# Altium PCB Planar design.PcbDoc
Units mil, origin at the board's own origin, x right, y up, seen from the top; angles counter-clockwise.
Board outline 4527.56 x 4330.71 mil, 4 copper layers (Top Layer, Mid 1, Mid 2, Bottom Layer), stack 68.583 mil thick; 7 components, 73 nets, 76 pads, 0 vias.
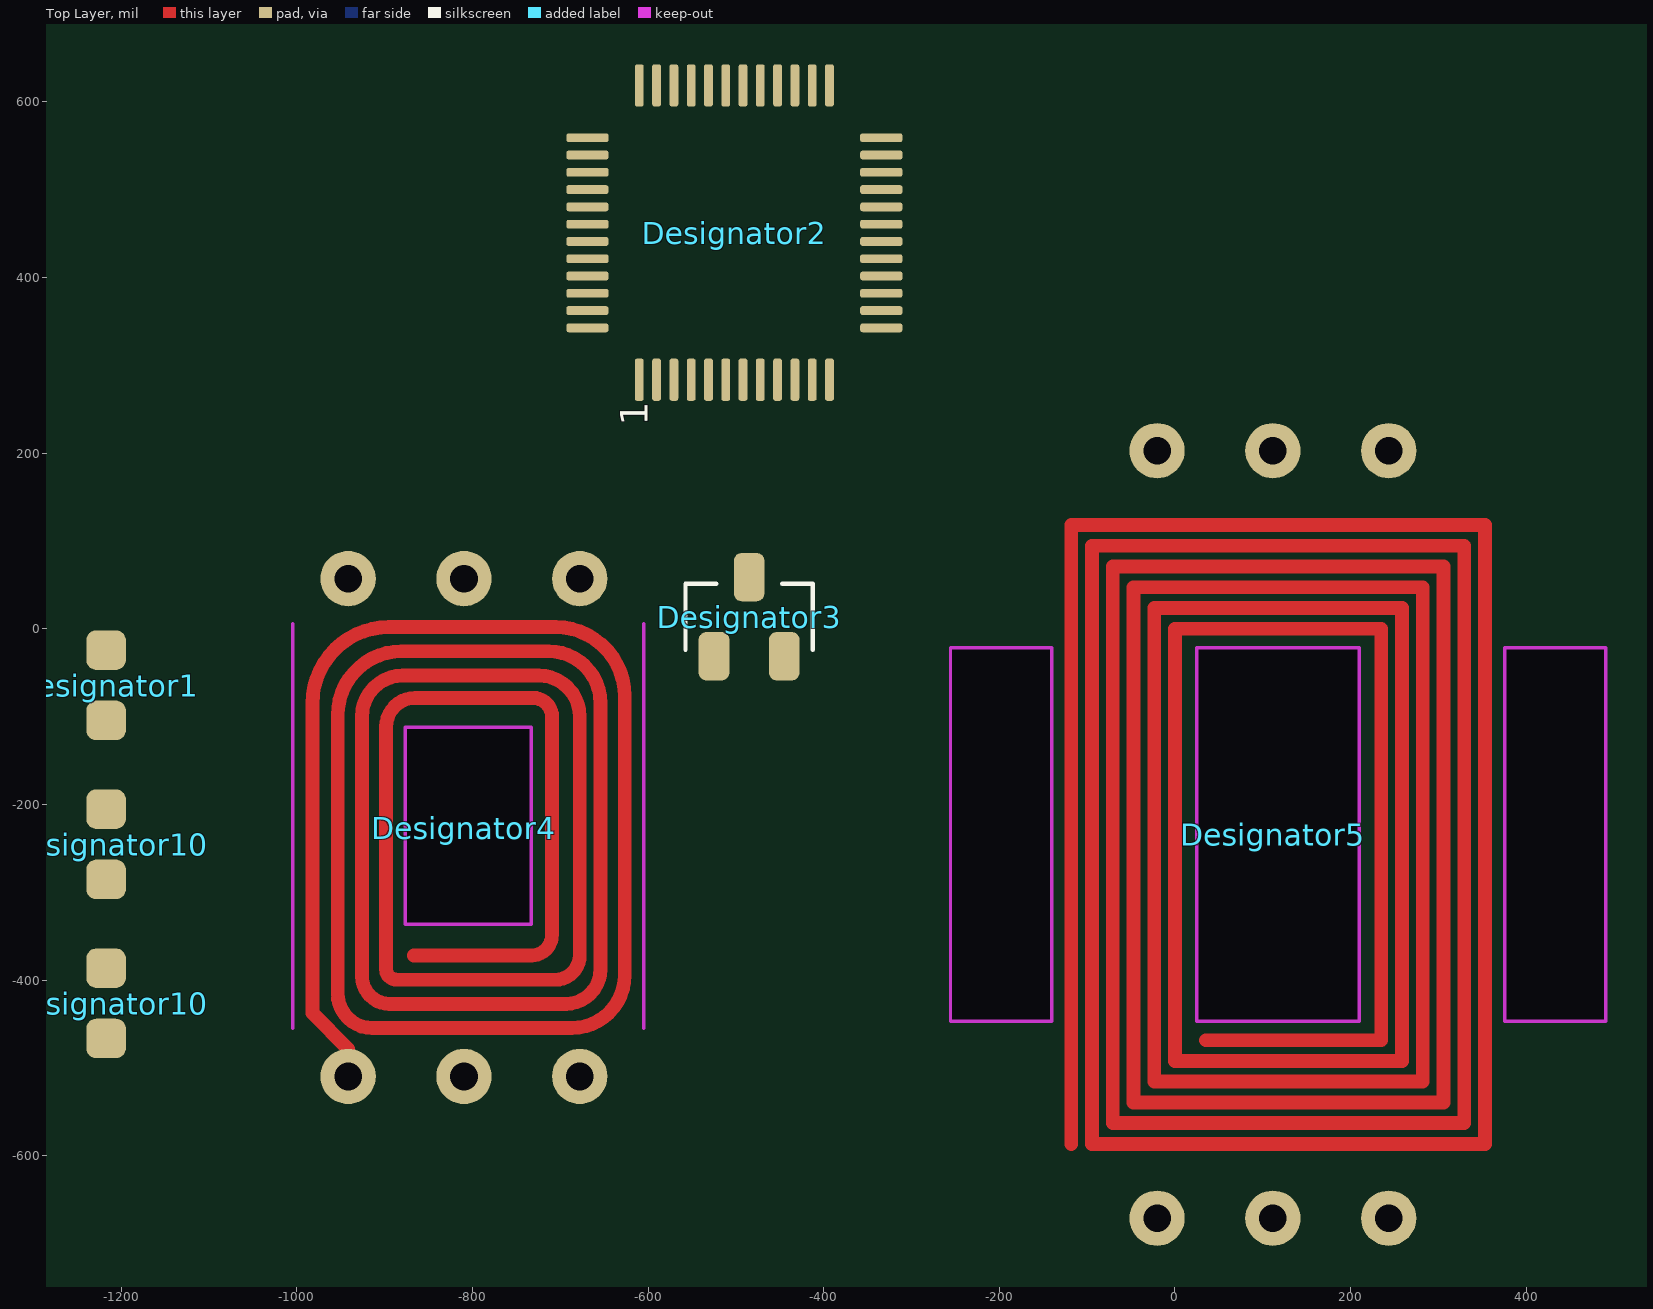
[diagram p0: Top Layer view]
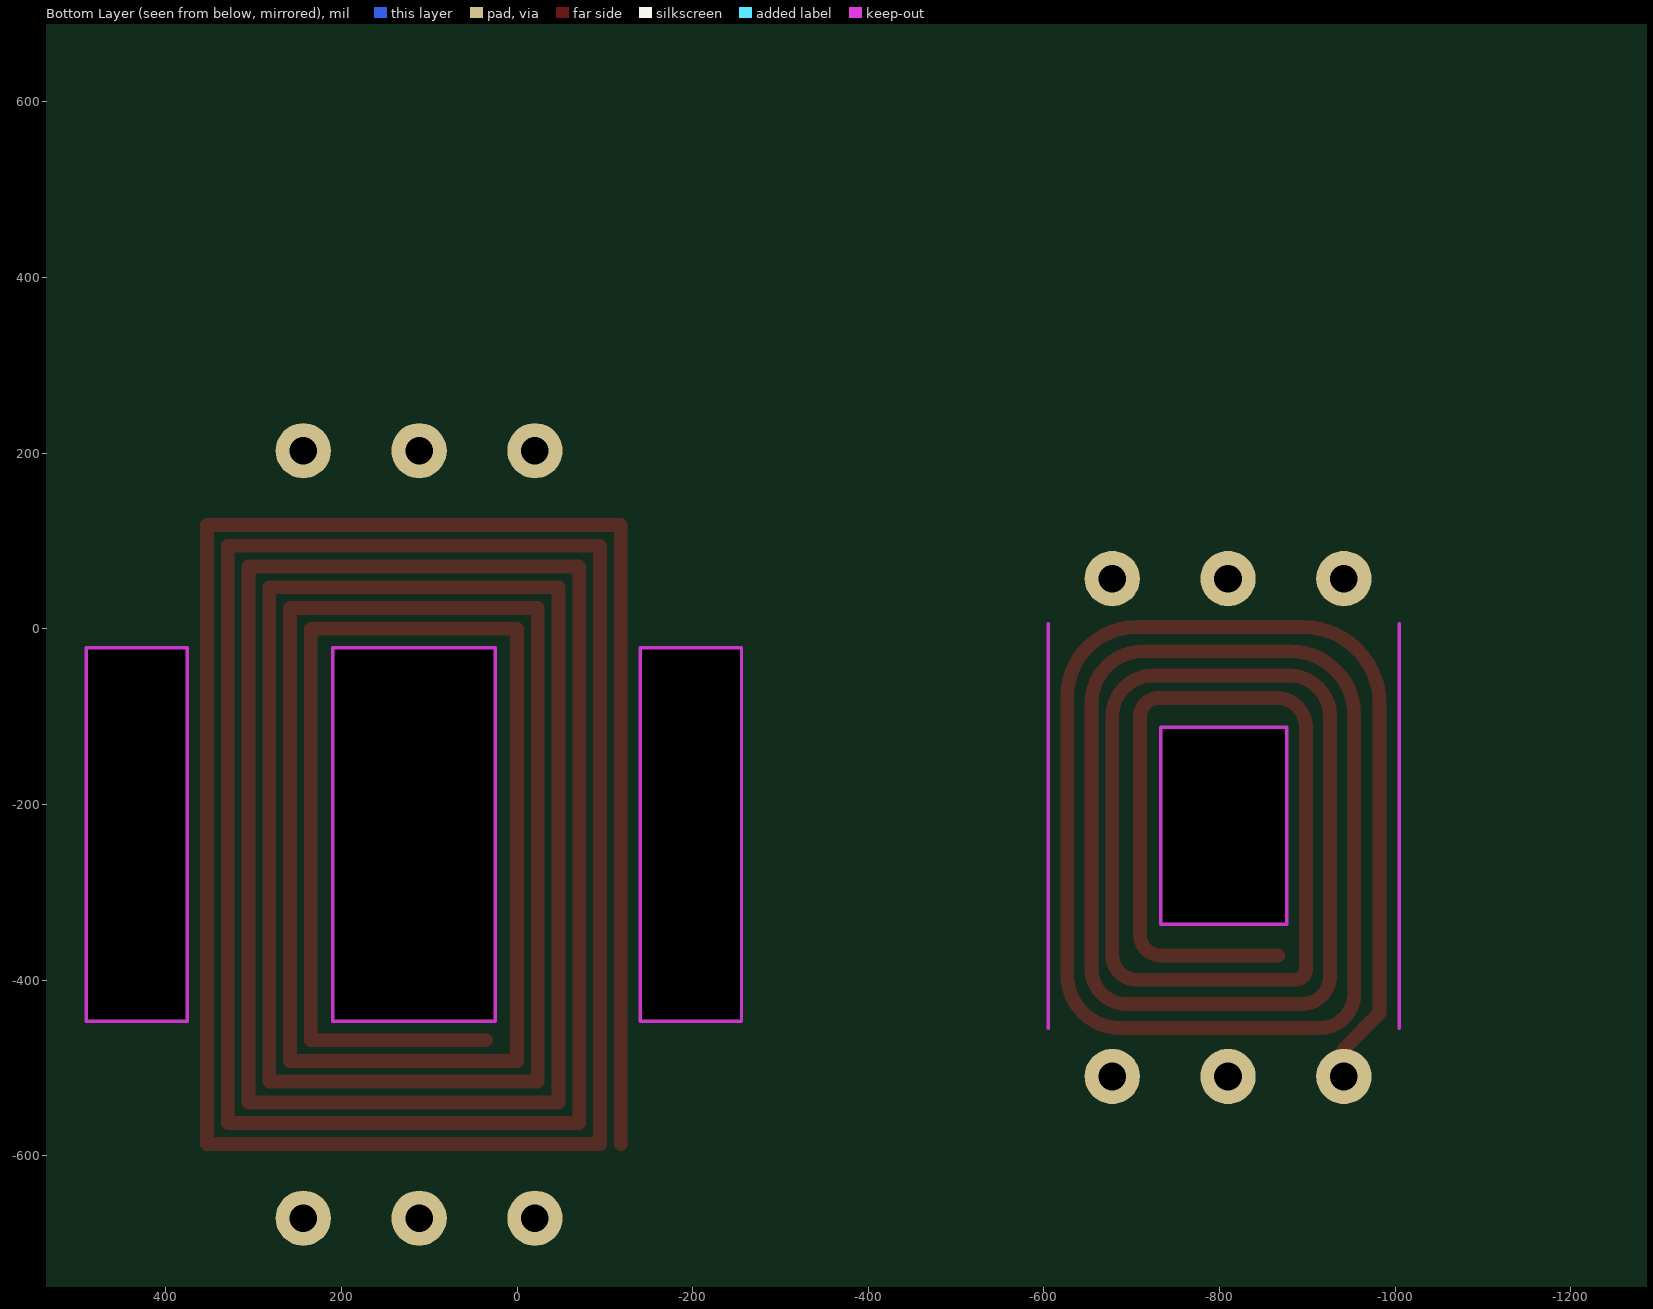
[diagram p1: Bottom Layer view, seen from below]

## Layer stack, top to bottom
Top Layer: signal copper 1.378
Dielectric: prepreg 15.748, FR-4, Dk 4.2
Mid 1: signal copper 1.4173
Dielectric: core 31.4961, FR-4, Dk 4.8
Mid 2: signal copper 1.4173
Dielectric: prepreg 15.748, FR-4, Dk 4.8
Bottom Layer: signal copper 1.378

## Board outline
-1885.53,-3171.26 -1885.53,1159.45 2642.03,1159.45 2642.03,-3171.26
cut-out: 375.3,-446.85 490.45,-446.85 490.45,-21.65 375.3,-21.65
cut-out: -255.61,-446.85 -140.45,-446.85 -140.45,-21.65 -255.61,-21.65
cut-out: 24.9,-446.85 24.9,-21.65 209.94,-21.65 209.94,-446.85
cut-out: -876.67,-336.61 -732.97,-336.61 -732.97,-112.2 -876.67,-112.2

## Design rules (kind name [scope] priority, off if disabled: settings)
AssemblyTestPointUsage [All] p1 off:
AssemblyTestpoint [All] p1 off: testpointundercomponent=TRUE minsize=40 maxsize=100 preferedsize=60 minholesize=0 maxholesize=40 preferedholesize=32 testpointgrid=1 usegrid=FALSE gridtolerance=0.01 allowsidebottom=TRUE minspacing=100
Clearance Terra [InNetClass('Terra') vs InNetClass('-UD') OR InNetClass('DGND')] p1 off: gap=315
Clearance -UD [InNetClass('-UD') vs InNetClass('Terra') OR InNetClass('DGND')] p2 off: gap=315
Clearance DGND [InNetClass('DGND') vs InNetClass('Terra') OR InNetClass('-UD')] p3 off: gap=315
Clearance "Mec Holes" [InNetClass('All Nets') vs InPadClass('Mec Holes')] p4: gap=12
Clearance "Fix Holes" [InNetClass('All Nets') vs InPadClass('Fix Holes')] p5: gap=196.85
Clearance "Keepout Clearance" [InNetClass('All Nets') vs IsKeepOut] p6: gap=11.81
Clearance "Clearance All Typical" [InNetClass('All Nets') vs InNetClass('All Nets')] p7 off: gap=20
Clearance "Clearance All 9mils" [All] p8: gap=11.81
ComponentClearance [All] p1 off: gap=10 collisioncheckmode=3 verticalgap=10 showdistances=FALSE
FabricationTestpoint [All] p1: side=2 testpointundercomponent=TRUE minsize=40 maxsize=100 preferedsize=60 minholesize=0 maxholesize=40 preferedholesize=32 testpointgrid=1 allowsidebottom=TRUE usegrid=FALSE gridtolerance=0.01 minspacing=100
FanoutControl Fanout_BGA [IsBGA] p1 off: bgadir=Out bgaviamode=Centered fanoutstyle=Auto fanoutdirection=Alternating viagrid=1 // Fanout_BGA (Default Rule)
FanoutControl Fanout_LCC [IsLCC] p2 off: bgadir=Out bgaviamode=Centered fanoutstyle=Auto fanoutdirection=Alternating viagrid=1 // Fanout_LCC (Default Rule)
FanoutControl Fanout_SOIC [IsSOIC] p3 off: bgadir=Out bgaviamode=Centered fanoutstyle=Auto fanoutdirection=Alternating viagrid=1 // Fanout_SOIC (Default Rule)
FanoutControl Fanout_Small [(CompPinCount < 5)] p4 off: bgadir=Out bgaviamode=Centered fanoutstyle=Auto fanoutdirection=OutThenIn viagrid=1 // Fanout_Small (Default Rule)
FanoutControl Fanout_Default [All] p5 off: bgadir=Out bgaviamode=Centered fanoutstyle=Auto fanoutdirection=Alternating viagrid=1 // Fanout_Default (Default Rule)
Height [All] p1 off: minheight=0 maxheight=1000 prefheight=500
HoleSize [All] p1: absolutevalues=TRUE maxlimit=393.7 minlimit=7.87 maxpercent=80.000 minpercent=20.000
MinimumSolderMaskSliver [All] p1 off: minsoldermaskwidth=10
NetAntennae [All] p1 off: netantennaetolerance=0
PolygonConnect "PolygonConnect Power" [All] p1: connectstyle=Direct reliefconductorwidth=10 reliefentries=4 polygonreliefangle="90 Angle"
RoutingCorners [All] p1 off: cornerstyle=45-Degree minsetback=100 maxsetback=100
RoutingLayers [All] p1: top layer_v5=TRUE mid layer 1_v5=FALSE mid layer 2_v5=FALSE bottom layer_v5=TRUE
RoutingVias [All] p1: holewidth=11.81 width=25 viastyle="Through Hole" minholewidth=7.87 minwidth=25 maxholewidth=20 maxwidth=50
SilkToSilkClearance [All] p1 off: silktosilkclearance=10
SilkscreenOverComponentPads SilkToSolderMaskClearance [IsPad] p1 off: minsilkscreentomaskgap=10
SolderMaskExpansion [All] p1: expansion=4
Width [All] p1: maxlimit=500 minlimit=9 preferedwidth=10
11 further rules are at their usual default settings.

## Classes and differential pairs
channel class Voltage_measure: Voltage_measure_bat Voltage_measure_pv
component class Buck_converter: V1 V2 V3
component class Driver_SW: V5 VZ2

## Components (designator, comment, footprint, x,y, rotation, side; value= is the part's Value field where it differs from the comment)
Designator1 "Comment" C0805A -1217.22,-104.33 r90 top
Designator2 "Comment" LQFP48 -610.24,283.46 r90 top
Designator3 "Comment" SOT23A -484.94,13.78 r0 top
Designator4 "Comment" E14_Planar_Core -803.84,-218.5 r0 top
Designator5 "Comment" E18_PLANAR_CORE 117.42,-234.25 r0 top locked
Designator10 "Comment" C0805A -1217.22,-466.54 r90 top
Designator10 "Comment" C0805A -1217.22,-285.43 r90 top

## Footprints (in the part's own frame and the unit in brackets; to place one, negate y for a bottom-side part, rotate by r counter-clockwise, add the part's x,y. Pads: shape width x height; smd on the part's side, far side on the other; paste and mask are expansions set on the pad)
C0805A [mil]
  rrect50% 45x45 smd: 1(0,0) 2(80,0)
  body extent 1,-25 79,25, height 31
E14_Planar_Core [mm]
  round 1.6 hole 0.8 unplated: 1(-3.5,-7.4) 1(-3.5,7) 1(-0.15,-7.4) 1(-0.15,7) 1(3.2,-7.4) 1(3.2,7)
  body extent -7.17,-2.7 7.12,2.4, height 3.6
E18_PLANAR_CORE [mm]
  round 1.6 hole 0.8 unplated: 1(-3.5,-11.1) 1(-3.5,11.1) 1(-0.15,-11.1) 1(-0.15,11.1) 1(3.2,-11.1) 1(3.2,11.1)
  body extent -9.18,-5.1 9.18,5.1, height 3.5
LQFP48 [mil]
  rrect50% 48x10 smd: 1(0.15,-0.2) 2(0.15,-19.89) 3(0.15,-39.57) 4(0.15,-59.26) 5(0.15,-78.94) 6(0.15,-98.63) 7(0.15,-118.32) 8(0.15,-138) 9(0.15,-157.68) 10(0.15,-177.37) 11(0.15,-197.06) 12(0.15,-216.74) 25(335.3,-216.74) 26(335.3,-197.06) 27(335.3,-177.37) 28(335.3,-157.68) 29(335.3,-138) 30(335.3,-118.32) 31(335.3,-98.63) 32(335.3,-78.94) 33(335.3,-59.26) 34(335.3,-39.57) 35(335.3,-19.89) 36(335.3,-0.2)
  rrect50% 10x48 smd: 13(59.2,-275.8) 14(78.89,-275.8) 15(98.57,-275.8) 16(118.26,-275.8) 17(137.94,-275.8) 18(157.63,-275.8) 19(177.32,-275.8) 20(197,-275.8) 21(216.68,-275.8) 22(236.37,-275.8) 23(256.06,-275.8) 24(275.74,-275.8) 37(275.74,58.85) 38(256.06,58.85) 39(236.37,58.85) 40(216.68,58.85) 41(197,58.85) 42(177.32,58.85) 43(157.63,58.85) 44(137.94,58.85) 45(118.26,58.85) 46(98.57,58.85) 47(78.89,58.85) 48(59.2,58.85)
  body extent -10,-286 345,69, height 63
SOT23A [mil]
  rrect50% 35x55 smd: A(-40,-45) K(0,45) NC(40,-45)
  silkscreen extent -72,-38 72,38, body extent -57,-55 57,55, height 51

## Free pads (board coordinates)
  round 62.99 hole 31.5 unplated: 1(-941.63,-509.84) 1(-941.63,57.09) 1(-809.74,-509.84) 1(-809.74,57.09) 1(-677.85,-509.84) 1(-677.85,57.09)
  round 19.68 on Mech1: 1(-804.82,-324.8)

## Nets (pads, with @x,y where several pads share a name; then routed paths per layer and width w, separated by ;. In a path a pad name is that pad's centre, name@x,y a point inside that pad or via, vN(x,y) a via of type N, cw(c..) or ccw(c..) an arc to the next point about the centre after c; other vN are vias at no path point)
3V3: 
15V: pad.1@-941.63,57.09
-PV: pad.1@-809.74,-509.84
\R\E\S\E\T\: 
BAT_+: pad.1@-677.85,57.09
FAN_SPEED: 
GATE_RECT: 
GATE_SW: 
GND: pad.1@-809.74,57.09
GPIO34: 
HOT_SPOT: 
IN-: 
IO: 
LED_BAT: 
LED_FAULT: 
LED_OUT: 
LED_PV: 
NetC11_2: 
NetC14_2: 
NetC21_2: 
NetC22_2: 
NetC23_2: 
NetC24_1: 
NetC24_2: 
NetC28_1: 
NetC28_2: 
NetC44_2: 
NetC45_1: 
NetD1_1: 
NetD1_3: 
NetD1_5: 
NetD2_1: 
NetD2_3: 
NetD2_5: 
NetH1_A: 
NetH2_A: 
NetH3_A: 
NetH4_A: 
NetR9_2: 
NetR12_1: 
NetR16_2: 
NetR18_2: 
NetR21_1: 
NetR25_1: 
NetR26_1: 
NetR26_2: 
NetR30_1: 
NetR31_1: 
NetR34_1: 
NetR37_1: 
NetR50_1: 
NetR54_1: 
OUT: 
OUTPUT: 
PV_+: 
PWM1A: 
PWM1B: 
PWM2B: 
PWM3A: 
SCI_RX: 
SCI_TX: 
TCK: 
TDI: 
TDO: 
TMS: 
TRST: 
VBAT: 
VCC_SW: 
VDD:  | length 11239.4
  Top Layer w15.75: -118.11,-586.61 -118.11,118.11 352.95,118.11 352.95,-586.61 -94.49,-586.61 -94.49,94.49 329.33,94.49 329.33,-562.99 -70.87,-562.99 -70.87,70.87 305.71,70.87 305.71,-539.37 -47.24,-539.37 -47.24,47.24 282.09,47.24 282.09,-515.75 -23.62,-515.75 -23.62,23.62 258.47,23.62 258.47,-492.13 0,-492.13 0,0 234.84,0 234.84,-468.5 35.43,-468.5
VDD1: pad.1@-677.85,-509.84
VDD2: pad.1@-941.63,-509.84 | length 4927.2
  Top Layer w15.75: pad.1@-941.63,-509.84 -941.63,-478.35 -982.28,-437.7 -982.28,-85.23 cw(c-895.08,-85.23) -895.08,1.97 -705.41,1.97 cw(c-705.41,-76.77) -626.67,-76.77 -626.67,-394.39 cw(c-687.01,-394.39) -687.01,-454.72 -914.07,-454.72 cw(c-914.07,-415.35) -953.44,-415.35 -953.44,-98.36 cw(c-880.68,-98.36) -880.68,-25.59 -713.29,-25.59 cw(c-713.29,-84.65) -654.23,-84.65 -654.23,-387.8 cw(c-693.6,-387.8) -693.6,-427.17 -894.39,-427.17 cw(c-894.39,-395.67) -925.89,-395.67 -925.89,-100 cw(c-879.04,-100) -879.04,-53.15 -724.7,-53.15 cw(c-724.7,-100) -677.85,-100 -677.85,-372.05 cw(c-705.41,-372.05) -705.41,-399.61 -886.52,-399.61 cw(c-886.52,-387.8) -898.33,-387.8 -898.33,-111.81 cw(c-865.26,-111.81) -865.26,-78.74 -731,-78.74 cw(c-731,-100.39) -709.35,-100.39 -709.35,-348.43 cw(c-732.97,-348.43) -732.97,-372.05 -866.83,-372.05
VDDA: 
VIN_PV: 
pads on no net: Designator1.1 Designator1.2 Designator2.1 Designator2.2 Designator2.3 Designator2.4 Designator2.5 Designator2.6 Designator2.7 Designator2.8 Designator2.9 Designator2.10 Designator2.11 Designator2.12 Designator2.13 Designator2.14 Designator2.15 Designator2.16 Designator2.17 Designator2.18 Designator2.19 Designator2.20 Designator2.21 Designator2.22 Designator2.23 Designator2.24 Designator2.25 Designator2.26 Designator2.27 Designator2.28 Designator2.29 Designator2.30 Designator2.31 Designator2.32 Designator2.33 Designator2.34 Designator2.35 Designator2.36 Designator2.37 Designator2.38 Designator2.39 Designator2.40 Designator2.41 Designator2.42 Designator2.43 Designator2.44 Designator2.45 Designator2.46 Designator2.47 Designator2.48 Designator3.A Designator3.K Designator3.NC Designator4.1 Designator5.1 Designator10.1 Designator10.2

## Keep-outs
Keep-Out Layer:
  lines w3.94: -1004.63,-454.72 -1004.63,5.91 ; -605.02,-454.72 -605.02,5.91 ; -876.67,-336.61 -876.67,-112.2 -732.97,-112.2 -732.97,-336.61 -876.67,-336.61 ; -255.61,-446.85 -140.45,-446.85 -140.45,-21.65 -255.61,-21.65 -255.61,-446.85 ; 24.9,-446.85 209.94,-446.85 209.94,-21.65 24.9,-21.65 24.9,-446.85 ; 375.3,-446.85 375.3,-21.65 490.45,-21.65 490.45,-446.85 375.3,-446.85

## Silkscreen, mask and mechanical layers (free items; w line width, h text height)
Comp Mec:
  lines w3.94: -1086.32,-324.8 -1086.32,-124.02 -1016.44,-124.02 -1016.44,-324.8 -1086.32,-324.8 ; -864.86,-324.8 -864.86,-124.02 -744.78,-124.02 -744.78,-324.8 -864.86,-324.8 ; -593.21,-324.8 -593.21,-124.02 -523.33,-124.02 -523.33,-324.8 -593.21,-324.8
Mec_DRW:
  lines w3.94: -1004.63,-454.72 -605.02,-454.72 ; -1004.63,5.91 -605.02,5.91

## Text inside footprints (layer, text, board x,y; h text height)
Designator2: Top Overlay "1" at -600.24,230.96 h31.25 r90